# Altium PCB HAT_controller.PcbDoc (part 1 of 2)
Units mm, origin at the board's own origin, x right, y up, seen from the top; angles counter-clockwise.
Board outline 64 x 85 mm, 4 copper layers (Top Layer, Ground Plane, Power Plane, Bottom Layer), stack 0.844 mm thick; 109 components, 55 nets, 306 pads, 89 vias.
Unrouted connection lines stored in the file: 3.
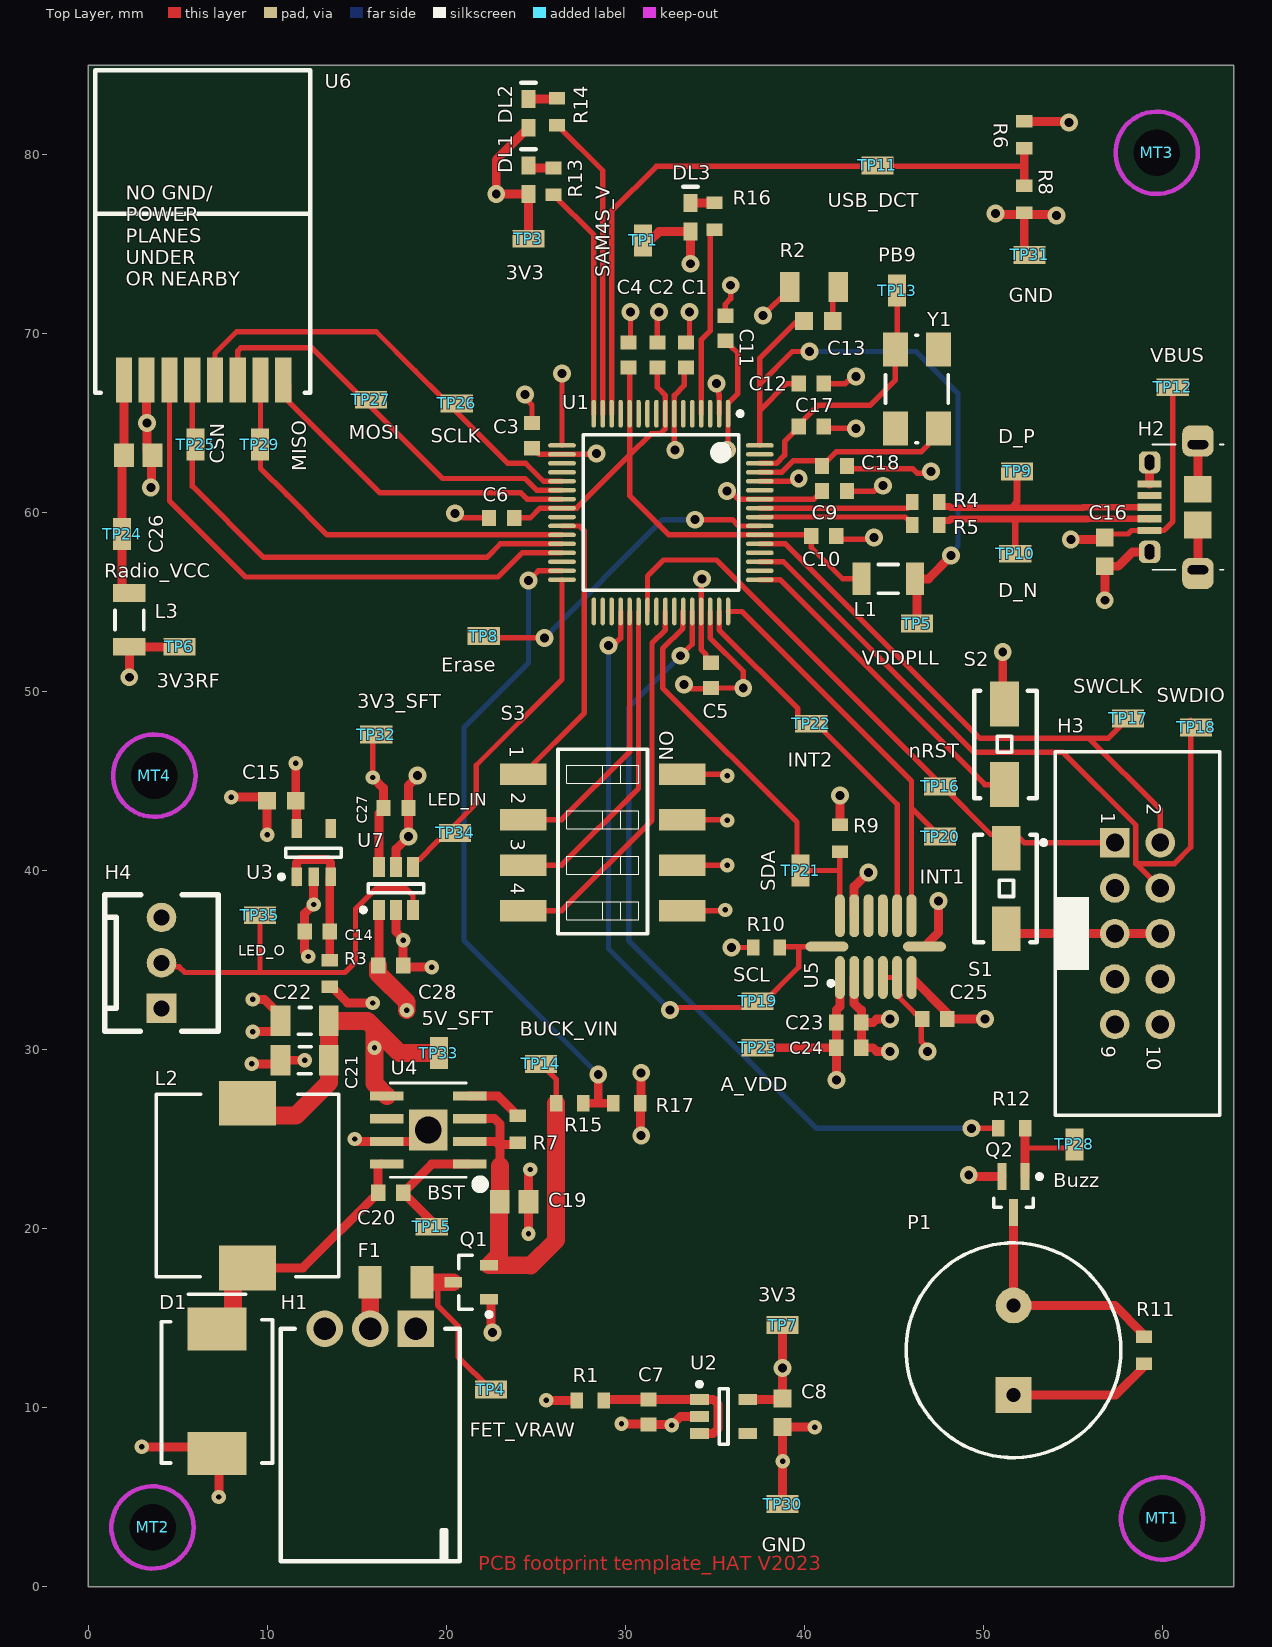
[diagram p0: Top Layer view]
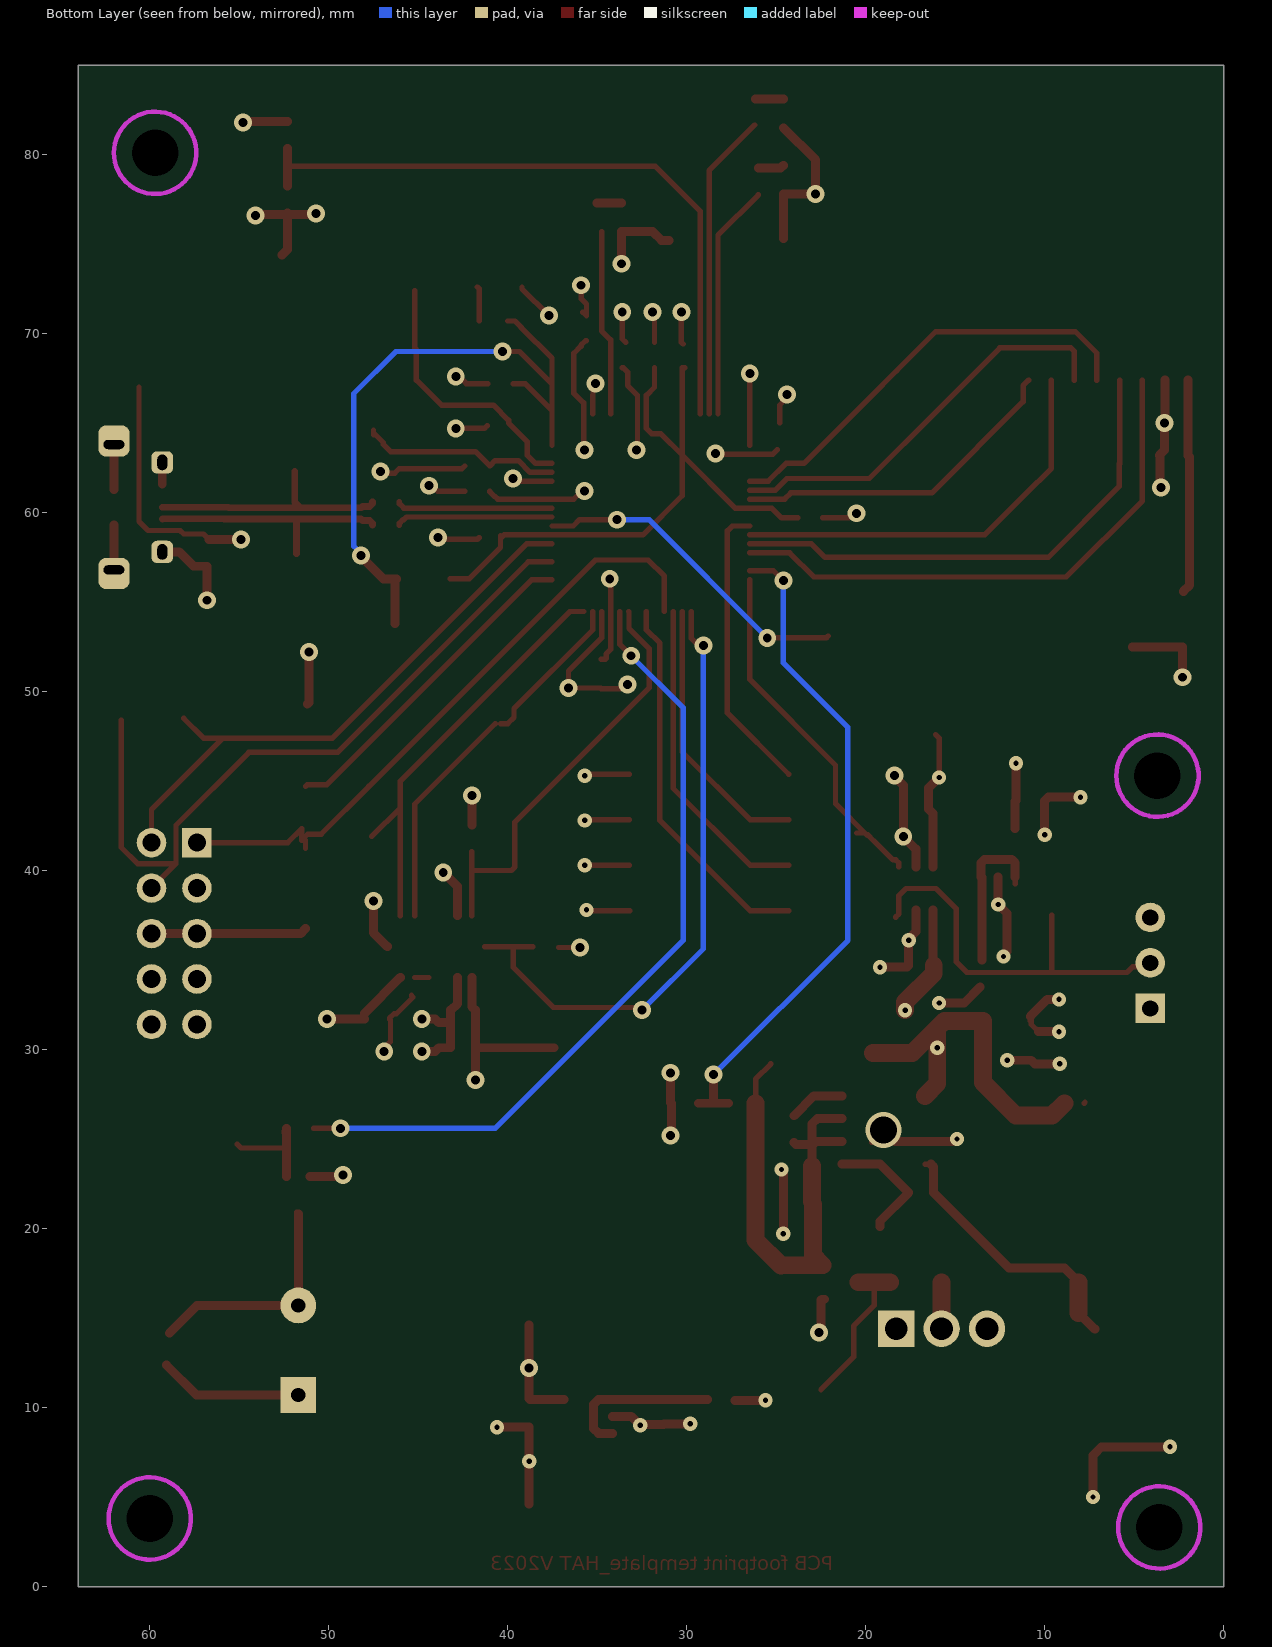
[diagram p1: Bottom Layer view, seen from below]
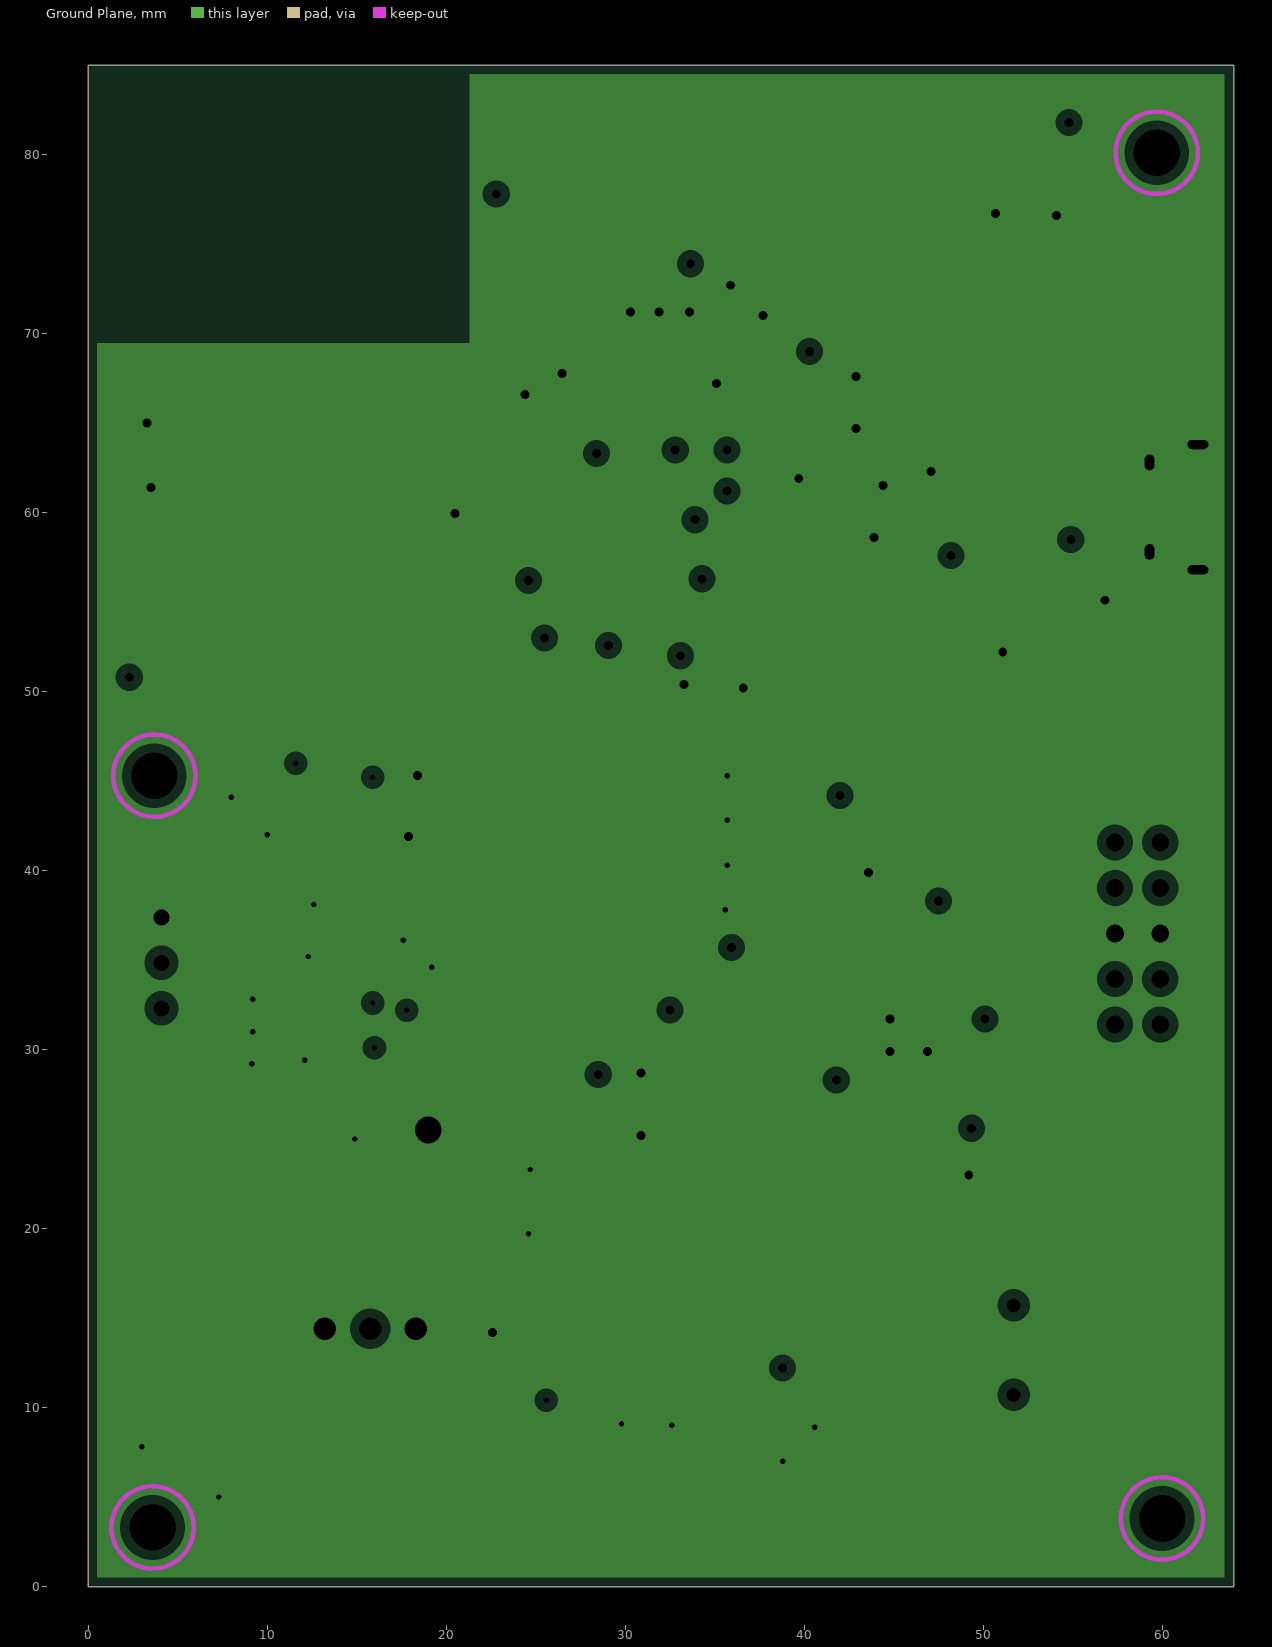
[diagram p2: Ground Plane, clearances drawn from the general rule]
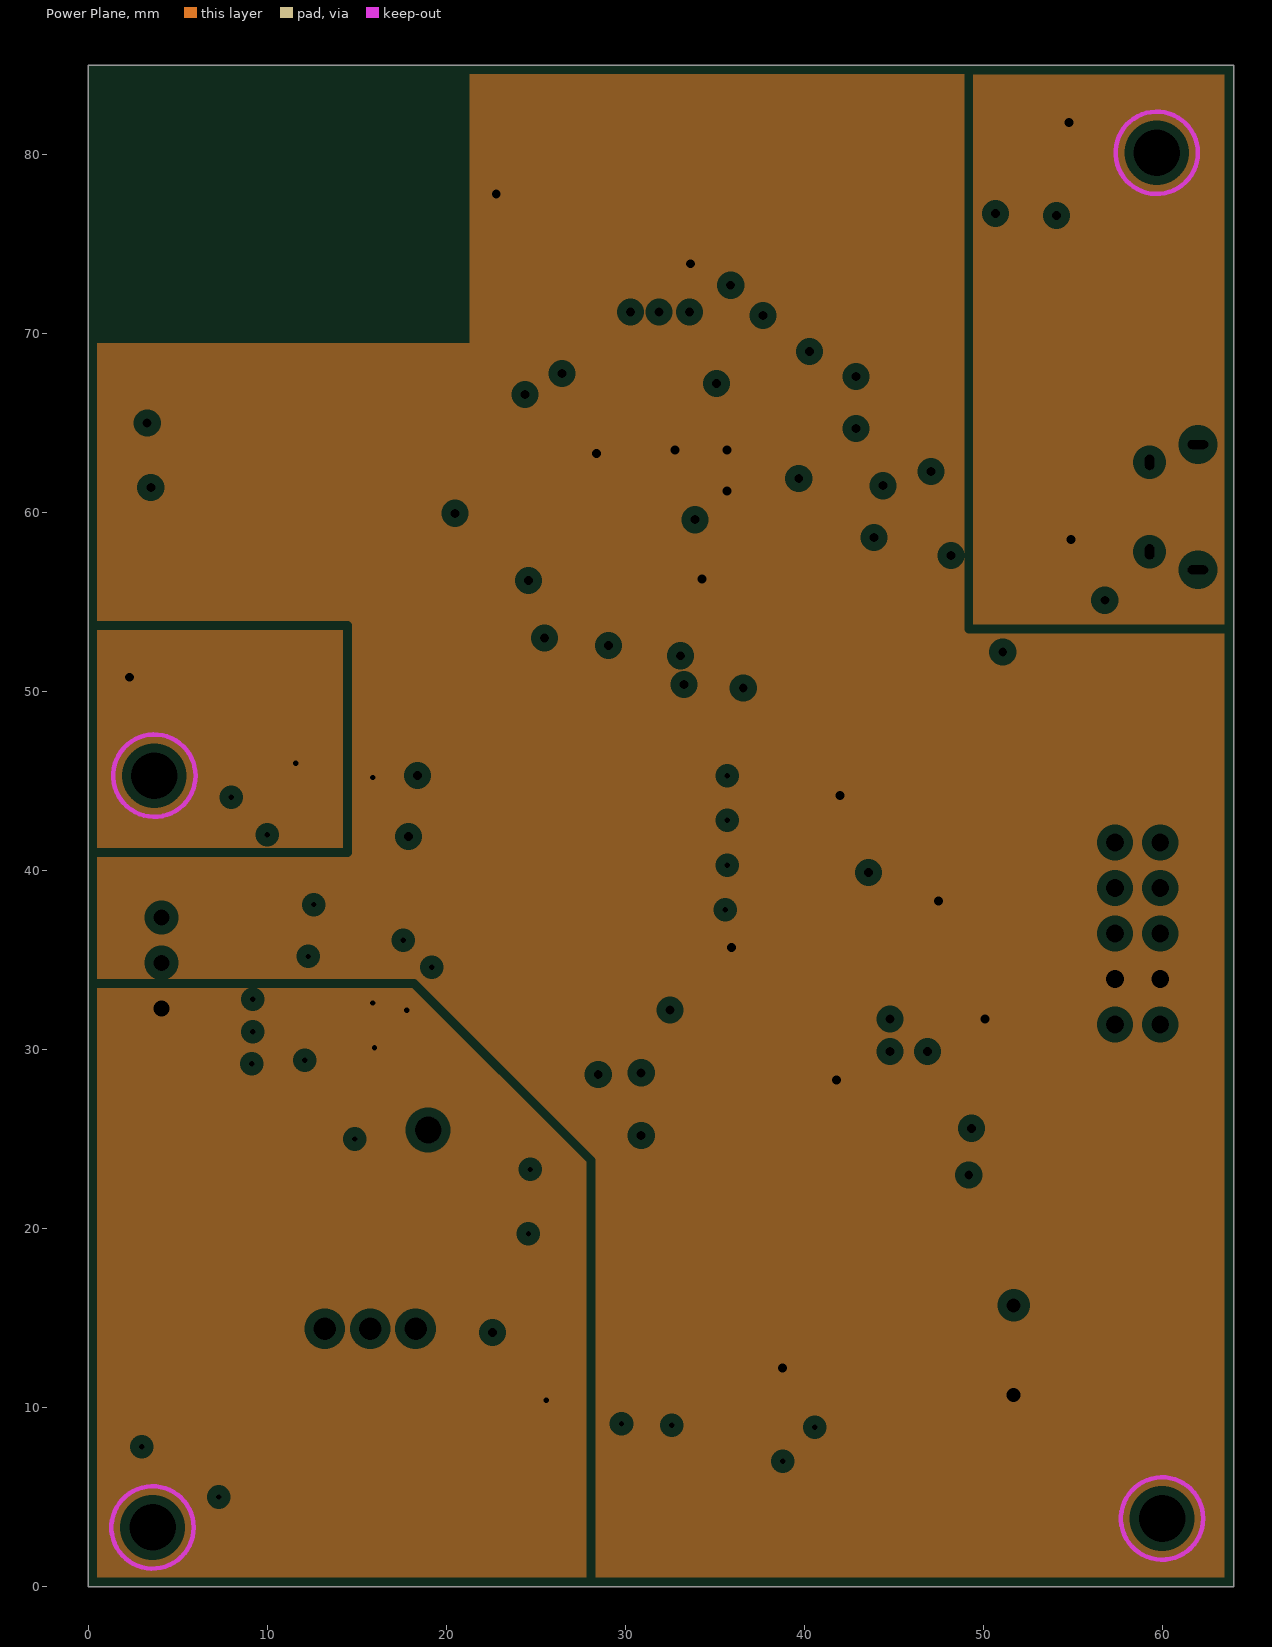
[diagram p3: Power Plane, clearances drawn from the general rule]

## Layer stack, top to bottom
Top Solder: solder mask 0.0102, Solder Resist, Dk 3.5
Top Layer: signal copper 0.0356
Dielectric 1: core 0.32, FR-4, Dk 4.8
Ground Plane: plane copper 0.036, net GND
Dielectric 3: prepreg 0.127, Dk 4.2
Power Plane: plane copper 0.036, net (Multiple Nets)
Dielectric 4: core 0.254, Dk 4.2
Bottom Layer: signal copper 0.0356
Bottom Solder: solder mask 0.0102, Solder Resist, Dk 3.5

## Board outline
0,85 64,85 64,0 0,0 0,85

## Design rules (kind name [scope] priority, off if disabled: settings)
BoardOutlineClearance [All] p1: gap=0.5 ignorepadtopadclearanceinfootprint=FALSE
Clearance GND_POLY [InNamedPolygon('GND')] p1: gap=0.254 ignorepadtopadclearanceinfootprint=FALSE
Clearance Min_Clearance_Circuit_Labs [All] p2: gap=0.2 ignorepadtopadclearanceinfootprint=FALSE
DiffPairsRouting [All] p1: maxlimit=0.254 minlimit=0.254 mostfreqgap=0.254 toplayer_minwidth=0.381 toplayer_maxwidth=0.381 toplayer_prefwidth=0.381 bottomlayer_minwidth=0.381 bottomlayer_maxwidth=0.381 bottomlayer_prefwidth=0.381 maxuncoupledlength=12.7
FanoutControl Fanout_BGA [IsBGA] p1 off: bgadir=Out bgaviamode=Centered fanoutstyle=Auto fanoutdirection=Alternating viagrid=0.025 // Fanout_BGA (Default Rule)
Height [All] p1: minheight=0 maxheight=50.8 prefheight=12.7
HoleSize [All] p1: absolutevalues=TRUE maxlimit=10 minlimit=0.3 maxpercent=80.000 minpercent=20.000
MinimumAnnularRing [All] p1: minimumring=0.1
MinimumSolderMaskSliver [All] p1: minsoldermaskwidth=0.102
NetAntennae [All] p1: netantennaetolerance=1
NetsToIgnore V_BATT [InNet('V_BATT')] p1:
NetsToIgnore 3v3rf [InNet('3V3_RF')] p2:
NetsToIgnore 3V3 [InNet('3V3')] p3:
PlaneClearance [All] p1: clearance=0.508
PlaneConnect [All] p1: planeconnectstyle=Relief reliefexpansion=0.508 reliefentries=4 reliefconductorwidth=0.254 reliefairgap=0.254
PolygonConnect [All] p1: connectstyle=Relief reliefconductorwidth=0.305 reliefentries=4 polygonreliefangle="90 Angle" airgapwidth=0.254
RoutingVias [All] p1: holewidth=0.5 width=1 viastyle="Through Hole" minholewidth=0.3 minwidth=0.8 maxholewidth=1 maxwidth=2
SMDNeckDown [All] p1 off: percent=50.000
SMDToCorner [All] p1: distance=98425
SMDToPlane [All] p1: distance=1968504
SilkToSolderMaskClearance SilkscreenOverComponentPads [IsPad] p1: minsilkscreentomaskgap=0.2 clearancetoexposedcopper=TRUE
SolderMaskExpansion [All] p1: expansion=0.102 istentingtop=FALSE
ViasUnderSMD [All] p1: allowed=FALSE
Width [All] p1: maxlimit=2 minlimit=0.2 preferedwidth=0.3
21 further rules are at their usual default settings.

## Classes and differential pairs
differential pair D: +D_P -D_N

## Components (designator, comment, footprint, x,y, rotation, side; value= is the part's Value field where it differs from the comment)
C1 "100nF" CAPC1608L 33.4,68.8 r270 top
C2 "100nF" CAPC1608L 31.8,68.8 r270 top
C3 "100nF" CAPC1608L 24.8,64.3 r270 top
C4 "100nF" CAPC1608L 30.2,68.8 r270 top
C5 "100nF" CAPC1608L 34.8,50.9 r90 top
C6 "100nF" CAPC1608L 23.1,59.7 r0 top
C7 "1uF" CAPC1608L 31.299,9.75 r270 top
C8 "4.7uF" CAPC1608N 38.8,9.7 r270 top
C9 "100nF" CAPC1608L 41.7,61.2 r180 top
C10 "100nF" CAPC1608L 41.1,58.7 r180 top
C11 "100nF" CAPC1608L 35.6,70.3 r270 top
C12 "100nF" CAPC1608L 40.4,67.2 r0 top
C13 "4.7uF" CAPC1608N 40.8,70.7 r0 top
C14 "1uF" CAPC1608L 12.8,36.6 r180 top
C15 "4.7uF" CAPC1608N 10.8,43.9 r180 top
C16 "4.7uF" CAPC1608N 56.8,57.8 r270 top
C17 "27pF" CAPC1608L 40.4,64.8 r180 top
C18 "27pF" CAPC1608L 41.7,62.6 r180 top
C19 "10uF" CAPC2012L 23.8,21.5 r0 top
C20 "100nF" CAPC1608L 16.9,22 r0 top
C21 "22uF" CAPC3216L 12.1,29.4 r0 top
C22 "22uF" CAPC3216L 12.1,31.6 r0 top
C23 "10uF" CAPC1608L 42.5,31.5 r180 top
C24 "100nF" CAPC1608L 42.5,30.1 r180 top
C25 "1uF" CAPC1608L 47.3,31.7 r180 top
C26 "10uF" CAPC2012L 2.8,63.2 r0 top
C27 "100nF" CAPC1608L 17.2,43.5 r180 top
C28 "100nF" CAPC1608L 16.9,34.7 r180 top
D1 "MBRS330T3G 30V 4A" SMC 7.2,10.9 r90 top
DL1 "Red" WL-SMCW0603 24.6,79.4 r270 top
DL2 "Green" WL-SMCW0603 24.6,83.1 r270 top
DL3 "Red" WL-SMCW0603 33.65,77.3 r270 top
F1 "5A" RESC3216N 17.2,17 r0 top
H1 "Battery_HEADER_3pin" BATT_HEADER_3POS 15.76,14.4 r180 top
H2 "JS_USB_MICRO_B" FCI_USB_10118194-0001LF 63.45,60.3 r90 top
H3 "Header 5X2 Vert" IDC2.54-V10D 58.63,36.48 r270 top
H4 "3 Pin Molex KK Hdr" MOLEX_KK_3_HDR 4.1,32.3 r90 top
L1 "1A max, Idc 0.3R," INDC3216L 44.7,56.3 r180 top
L2 "IND 5.2UH 6A" INDUCTOR5u2 8.9,22.4 r90 top
L3 "1A max, Idc 0.3R," INDC3216L 2.3,54 r270 top
MT1 "M2.6 NPTH" MNT-HOLE_2.6mm_NPTH 60,3.8 r0 top
MT2 "M2.6 NPTH" MNT-HOLE_2.6mm_NPTH 3.6,3.3 r0 top
MT3 "M2.6 NPTH" MNT-HOLE_2.6mm_NPTH 59.7,80.1 r0 top
MT4 "M2.6 NPTH" MNT-HOLE_2.6mm_NPTH 3.7,45.3 r0 top
P1 "Piezo Buzzer" BUZZER 51.7,10.7 r90 top
Q1 "SSM3J328R,LF" SOT23_L 21.4,17 r180 top
Q2 "BC817W" SOT323_M 51.7,21.9 r270 top
R1 "0R" RESC1608L 28.05,10.4 r0 top
R2 "1R" RESC3216L 40.55,72.6 r180 top
R3 "0R" RESC1608L 13.5,34.25 r90 top
R4 "27R" RESC1608L 46.8,60.6 r180 top
R5 "27R" RESC1608L 46.8,59.3 r180 top
R6 "1K" RESC1608L 52.3,81.1 r270 top
R7 "100K" RESC1608L 24,25.55 r90 top
R8 "2K" RESC1608L 52.3,77.5 r270 top
R9 "10K" RESC1608L 42,41.8 r90 top
R10 "10K" RESC1608L 37.9,35.7 r180 top
R11 "1K" RESC1608L 59,13.2 r90 top
R12 "470R" RESC1608L 51.6,25.6 r0 top
R13 "3K" RESC1608L 26,78.5 r270 top
R14 "2K" RESC1608L 26.2,82.4 r270 top
R15 "220K" RESC1608L 26.9,27 r180 top
R16 "3K" RESC1608L 35,76.55 r270 top
R17 "#NAME?" RESC1608L 30.1,27 r0 top value=180K
S1 "EVQPNF05M" EVQPNF05M 51.3,39 r90 top
S2 "EVQPNF05M" EVQPNF05M 51.2,47.05 r270 top
S3 "WS_SW DIP-4" "DIP_SW_4WAY_SMD -" 24.3,45.38 r270 top
TP1 "SAM4S_V" TP_0603 31,75.2 r90 top
TP3 "3V3" TP_0603 24.6,75.3 r0 top
TP4 "FET_VRAW" TP_0603 22.5,11 r0 top
TP5 "VDDPLL" TP_0603 46.3,53.8 r180 top
TP6 "3V3RF" TP_0603 5.1,52.5 r0 top
TP7 "3V3" TP_0603 38.8,14.6 r0 top
TP8 "Erase" TP_0603 22.1,53.1 r0 top
TP9 "D_P" TP_0603 51.9,62.3 r0 top
TP10 "D_N" TP_0603 51.8,57.7 r180 top
TP11 "USB_DCT" TP_0603 44.1,79.4 r180 top
TP12 "VBUS" TP_0603 60.6,67 r0 top
TP13 "PB9" TP_0603 45.2,72.4 r90 top
TP14 "BUCK_VIN" TP_0603 25.3,29.2 r0 top
TP15 "BST" TP_0603 19.2,20.1 r0 top
TP16 "nRST" TP_0603 47.6,44.7 r0 top
TP17 "SWCLK" TP_0603 58.1,48.5 r0 top
TP18 "SWDIO" TP_0603 61.9,48 r0 top
TP19 "SCL" TP_0603 37.4,32.7 r180 top
TP20 "INT1" TP_0603 47.6,41.9 r0 top
TP21 "SDA" TP_0603 39.8,40 r90 top
TP22 "INT2" TP_0603 40.4,48.2 r180 top
TP23 "A_VDD" TP_0603 37.4,30.1 r0 top
TP24 "Radio_VCC" TP_0603 1.9,58.8 r90 top
TP25 "CSN" TP_0603 6,63.8 r270 top
TP26 "SCLK" TP_0603 20.6,66.1 r0 top
TP27 "MOSI" TP_0603 15.8,66.3 r0 top
TP28 "Buzz" TP_0603 55.1,24.7 r90 top
TP29 "MISO" TP_0603 9.6,63.8 r90 top
TP30 "GND" TP_0603 38.8,4.6 r0 top
TP31 "GND" TP_0603 52.6,74.4 r0 top
TP32 "3V3_SFT" TP_0603 16.1,47.6 r0 top
TP33 "5V_SFT" TP_0603 19.6,29.8 r90 top
TP34 "LED_IN" TP_0603 20.5,42.1 r180 top
TP35 "LED_O" TP_0603 9.6,37.5 r180 top
U1 "ATSAM4S8BA-ANR" LQFP64_L 32,60 r270 top locked
U2 "CAT6219-330TDGT3" SOT95P280X145-5N 35.5,9.5 r0 top
U3 "CAT6219-330TDGT3" SOT95P280X145-5N 12.6,41 r90 top
U4 "ADP2302ARDZ-5.0 BUCK" RD_8_1 19,25.5 r180 top locked value=Value
U5 "ADXL345BCCZ" ADI-CC-14-1_V 44,35.75 r90 top locked
U6 "nRF24 SMD" NRF24 0.4,66.7 r0 top
U7 "SN74LVC1T45" SOT23-6_N 17.2,39 r90 top
Y1 "12MHz" 6.0X3.5-4 46.3,66.9 r270 top

## Footprints (in the part's own frame and the unit in brackets; to place one, negate y for a bottom-side part, rotate by r counter-clockwise, add the part's x,y. Pads: shape width x height; smd on the part's side, far side on the other; paste and mask are expansions set on the pad)
6.0X3.5-4 [mm] "4 SMD 6.0X3.5 mm No Lead Crystal"
  rect 1.9x1.4 smd: 1(-2.2,-1.2) 2(2.2,-1.2) 3(2.2,1.2) 4(-2.2,1.2)
  silkscreen extent -3,-1.75 3,1.75, body extent -3,-1.75 3,1.75, height 1.2
ADI-CC-14-1_V [mm]
  oval 2.4x0.55 smd: 1(-1.725,2) 2(-1.725,1.2) 3(-1.725,0.4) 4(-1.725,-0.4) 5(-1.725,-1.2) 6(-1.725,-2) 8(1.725,-2) 9(1.725,-1.2) 10(1.725,-0.4) 11(1.725,0.4) 12(1.725,1.2) 13(1.725,2)
  oval 0.55x2.4 smd: 7(0,-2.725) 14(0,2.725)
  silkscreen extent -2.18,2.37 -1.93,2.62, body extent -1.5,-2.5 1.5,2.5, height 1
BATT_HEADER_3POS [mil]
  rect 80x80 hole 50: 1(-100,0)
  round 80 hole 50: 2(0,0) 3(100,0)
  silkscreen extent -197,0 197,512, body extent -197,-31 200,504, height 294
BUZZER [mm]
  rect 2x2 hole 0.8: 1(0,0)
  round 2 hole 0.8: 2(5,0)
  silkscreen extent -3.5,-6 8.5,6, body extent -3.58,-6.08 8.58,6.08, height 6.5
CAPC1608L [mm] "Chip Capacitor, Body 1.6x0.8mm, IPC High Density"
  rect 0.8x0.9 smd: 1(-0.7,0) 2(0.7,0)
  body extent -0.87,-0.48 0.87,0.48, height 0.85
CAPC1608N [mm] "Chip Capacitor, Body 1.6x0.8mm, IPC Medium Density"
  rect 1x1 smd: 1(-0.8,0) 2(0.8,0)
  body extent -0.87,-0.48 0.87,0.48, height 0.85
CAPC2012L [mm] "Chip Capacitor, Body 2.0x1.3mm, IPC High Density"
  rect 1.1x1.3 smd: 1(-0.8,0) 2(0.8,0)
  body extent -1.1,-0.72 1.1,0.72, height 1.1
CAPC3216L [mm] "Chip Capacitor, Body 3.2x1.6mm, IPC High Density"
  rect 1.1x1.7 smd: 1(-1.35,0) 2(1.35,0)
  silkscreen extent -0.35,-0.75 0.35,0.75, body extent -1.7,-0.9 1.7,0.9, height 1.35
"DIP_SW_4WAY_SMD -" [mm] "DIP Switch; 8 Leads"
  rect 1.2x2.6 smd: 1(0,0) 2(2.54,0) 3(5.08,0) 4(7.62,0) 5(7.62,8.89) 6(5.08,8.9) 7(2.54,8.9) 8(0,8.9)
  silkscreen extent -1.4,1.95 8.9,6.95
EVQPNF05M [mm] "Panansonic light touch SMD push button switch"
  rect 2.5x1.6 smd: 1(-2.25,0) 2(2.25,0)
  silkscreen extent -3,-1.7 3,1.8, body extent -3,-1.7 3,1.8, height 5
FCI_USB_10118194-0001LF [mm] "Micro USB B Type Receptacle"
  rect 0.4x1.35 smd mask+0.07: 1(-1.3,4.15) 2(-0.65,4.15) 3(0,4.15) 4(0.65,4.15) 5(1.3,4.15)
  rrect50% 1.75x1.75 hole 0.5 slot 1.15 at 90 deg copper offset -0.2,0 paste-2539.97 mask+0.1: 6(-3.5,1.45)
  rrect50% 1.25x1.2 hole 0.55 slot 0.85 at 0 deg: 6(-2.5,4.15) 6(2.5,4.15)
  rect 1.5x1.55 smd: 6(-1,1.45) 6(1,1.45)
  rrect50% 1.75x1.75 hole 0.5 slot 1.15 at 90 deg copper offset 0.2,0 paste-2539.97 mask+0.1: 6(3.5,1.45)
  silkscreen extent -3.5,0 3.5,4
IDC2.54-V10D [mm] "Connector; IDC, Low Profile Male Header, Thru-Hole; 10 Position; Vertical; Pitch 2.54 mm; Body 20.32 x 9.2 x 9.45 mm (LxWxH)"
  rect 1.65x1.65 hole 1: 1(-5.08,-1.27)
  round 1.65 hole 1: 2(-5.08,1.27) 3(-2.54,-1.27) 4(-2.54,1.27) 5(0,-1.27) 6(0,1.27) 7(2.54,-1.27) 8(2.54,1.27) 9(5.08,-1.27) 10(5.08,1.27)
  silkscreen extent -10.16,-5.37 10.16,4.6, body extent -10.16,-4.6 10.16,4.6, height 9.45
INDC3216L [mm] "Chip Inductor, Body 3.2x1.6mm, IPC High Density"
  rect 1x1.8 smd: 1(-1.5,0) 2(1.5,0)
  silkscreen extent -0.55,-0.8 0.55,0.8, body extent -1.75,-0.95 1.75,0.95, height 1.9
INDUCTOR5u2 [mm]
  rect 2.5x3.2 smd: 1(-4.6,0) 2(4.6,0)
  silkscreen extent -5.1,-5.1 5.1,5.1, body extent -5,-5 5,5, height 3.8
LQFP64_L [mm] "Thin QFP, 64-Leads, Body 10x10mm, Pitch 0.5mm, IPC High Density"
  oval 1.55x0.25 smd mask+0.07: 1(-5.525,3.75) 2(-5.525,3.25) 3(-5.525,2.75) 4(-5.525,2.25) 5(-5.525,1.75) 6(-5.525,1.25) 7(-5.525,0.75) 8(-5.525,0.25) 9(-5.525,-0.25) 10(-5.525,-0.75) 11(-5.525,-1.25) 12(-5.525,-1.75) 13(-5.525,-2.25) 14(-5.525,-2.75) 15(-5.525,-3.25) 16(-5.525,-3.75) 33(5.525,-3.75) 34(5.525,-3.25) 35(5.525,-2.75) 36(5.525,-2.25) 37(5.525,-1.75) 38(5.525,-1.25) 39(5.525,-0.75) 40(5.525,-0.25) 41(5.525,0.25) 42(5.525,0.75) 43(5.525,1.25) 44(5.525,1.75) 45(5.525,2.25) 46(5.525,2.75) 47(5.525,3.25) 48(5.525,3.75)
  oval 0.25x1.55 smd mask+0.07: 17(-3.75,-5.525) 18(-3.25,-5.525) 19(-2.75,-5.525) 20(-2.25,-5.525) 21(-1.75,-5.525) 22(-1.25,-5.525) 23(-0.75,-5.525) 24(-0.25,-5.525) 25(0.25,-5.525) 26(0.75,-5.525) 27(1.25,-5.525) 28(1.75,-5.525) 29(2.25,-5.525) 30(2.75,-5.525) 31(3.25,-5.525) 32(3.75,-5.525) 49(3.75,5.525) 50(3.25,5.525) 51(2.75,5.525) 52(2.25,5.525) 53(1.75,5.525) 54(1.25,5.525) 55(0.75,5.525) 56(0.25,5.525) 57(-0.25,5.525) 58(-0.75,5.525) 59(-1.25,5.525) 60(-1.75,5.525) 61(-2.25,5.525) 62(-2.75,5.525) 63(-3.25,5.525) 64(-3.75,5.525)
  silkscreen extent -5.65,-4.35 4.35,4.55, body extent -5,-5 5,5, height 1.6
MNT-HOLE_2.6mm_NPTH [mm] "Mounting Hole 2.6mm non plated"
  round 0 hole 2.6 unplated: 1(0,0)
  Keep-Out Layer circle w0.254: c0,0 r2.3
MOLEX_KK_3_HDR [mil] "MOLEX_KK_3_HDR"
  rect 65x65 hole 35.43: 1(0,0)
  round 65 hole 35.43: 2(100,0) 3(200,0)
  silkscreen extent -50,-125 250,125, body extent -50,-114 250,114, height 461
NRF24 [mm]
  rect 0.9x2.5 smd: 1(1.6,0.7) 2(2.871,0.7) 3(4.143,0.7) 4(5.414,0.7) 5(6.686,0.7) 6(7.957,0.7) 7(9.229,0.7) 8(10.5,0.7)
  silkscreen extent 0,0 12,18, body extent 0,0 12,18, height 2.27
RD_8_1 [mil]
  rect 74x20 smd paste+0 mask+0: 1(-91,75) 2(-91,25) 3(-91,-25) 4(-91,-75) 5(91,-75) 6(91,-25) 7(91,25) 8(91,75)
  rect 84.65x90 smd paste-44.5 mask+0: EPAD(0,0)
  silkscreen extent -118,-104 84,123, body extent 0,0 10,10, height 10
RESC1608L [mm] "Chip Resistor, Body 1.6x0.8mm, IPC High Density"
  rect 0.7x0.9 smd: 1(-0.75,0) 2(0.75,0)
  body extent -0.85,-0.48 0.85,0.48, height 0.9
RESC3216L [mm] "Chip Resistor, Body 3.1x1.6mm, IPC High Density"
  rect 1.1x1.7 smd: 1(-1.35,0) 2(1.35,0)
  body extent -1.68,-0.87 1.68,0.87, height 2.54
RESC3216N [mm] "Chip Resistor, Body 3.2x1.6mm, IPC Medium Density"
  rect 1.3x1.8 smd: 1(-1.45,0) 2(1.45,0)
  body extent -1.68,-0.87 1.68,0.87, height 0.71
SMC [mm] "DO-214-AB/SMC; 2 C-Bend Leads; Body 7.9 x 5.9 mm, inc. leads (LxW)"
  rect 2.4x3.3 smd: 1(-3.475,0) 2(3.475,0)
  silkscreen extent -4,-3.1 5.43,3.1, body extent -4.22,-2.95 3.72,2.95, height 2.27
SOT23-6_N [mm]
  rect 1.1x0.65 smd: 1(-1.2,0.95) 2(-1.2,0) 3(-1.2,-0.95) 4(1.2,-0.95) 5(1.2,0) 6(1.2,0.95)
  silkscreen extent -1.32,-1.55 0.25,1.95, body extent -0.9,-1.55 0.9,1.55, height 1.45
SOT23_L [mm] "SOT23, 3-Leads, Body 2.9x1.3mm, Pitch 0.95mm, Lead Span 2.3mm, IPC High Density"
  rect 1x0.6 smd: 1(-1,0.95) 2(-1,-0.95) 3(1,0)
  silkscreen extent -1.13,-1.5 0.7,1.92, body extent -0.7,-1.5 0.7,1.5, height 1.1
SOT95P280X145-5N [mm] "SOT23, 5-Leads, Body 2.90x2.80mm, Pitch 0.95mm, IPC Medium Density"
  rect 1.05x0.6 smd: 1(-1.35,0.95) 2(-1.35,0) 3(-1.35,-0.95) 4(1.35,-0.95) 5(1.35,0.95)
  silkscreen extent -1.47,-1.55 0.25,1.92, body extent -0.87,-1.52 0.87,1.53, height 1.45
SOT323_M [mm] "SOT323, 3-Leads, Body 2.0x1.3mm, Pitch 0.65mm, Lead Span 2.1mm, IPC Low Density"
  rect 1.5x0.5 smd: 1(-1,0.65) 2(-1,-0.65) 3(1,0)
  silkscreen extent -1.12,-1.1 0.7,1.58, body extent -0.7,-1.1 0.7,1.1, height 1.1
TP_0603 [mm] "TestPoint 0603"
  rect 1.8x1 smd: 1(0,0)
  body extent -1,-0.6 1,0.6, height 0.9
WL-SMCW0603 [mm] "2.4 x 0.8 x 0.7mm LED"
  rect 1x0.8 smd: 1(0,0) 2(1.6,0)
  silkscreen extent -0.9,-0.4 -0.9,0.4

## Part data
C1 C2 C3 C4 C5 C6 C9 C10 C11 C12 C20 C24 C27 C28: library part CC_100nF_0603, "CAP CER 100nF X7R +-10% 50V 0603", Code_IPC="1608 [0603]", PackageReference=0603, Storage Location="PCB Assembly WS", Supplier="ECE Dept"
C7 C14 C25: library part CC_1uF_0603, "CAP CER 1uF Y5V -20% +80% 16V 0603", Max Voltage=16V, Code_IPC="1608 [0603]", PackageReference=0603, Storage Location="PCB Assembly WS", Supplier="ECE Dept"
C8 C13 C15 C16: library part CC_4.7uF_0603, "CAP CER 4.7uF X5R +-20%  10V 0603", Max Voltage=10V, Code_IPC=2012[0805], Note="Footprint corresponds to dimensions for bulk cassette packaging. This case size has tightened tolerances.", PackageReference=0805, Storage Location="PCB Assembly WS", Supplier="ECE Dept"
C17 C18: library part CC_27pF_0603, "CAP CER 27pF NPO/COG +-5% 50V 0603", Code_IPC="1608 [0603]", PackageReference=0603, Storage Location="PCB Assembly WS", Supplier="ECE Dept"
C19: library part CC_10uF_0805_16V, "CAP CER 10uF X5R 16V 0805", Manufacturer="Samsung Electro-Mechanics", Manufacturer Part Number=CL21A106KOQNNWE, Max Voltage=16V, Operating Temperature="-55°C ~ 85°C", Package / Case="0805 (2012 Metric)", Ratings=-, Supplier Part Number 1=1276-2894-1-ND, Temperature Coefficient=X5R, Tolerance=±10%, Applications="General Purpose", Category=Capacitors, Code_IPC=2012[0805], ComponentLink1Description=http://www.samsungsem.com/kr/support/product-search/mlcc/CL21A106KOQNNWE.jsp, ComponentLink1URL=http://www.samsungsem.com/kr/support/product-search/mlcc/CL21A106KOQNNWE.jsp, Features=-, Height - Seated (Max)=-, Lead Spacing=-, Lead Style=-, Mounting Type="Surface Mount, MLCC", Note="Footprint corresponds to dimensions for bulk cassette packaging. This case size has tightened tolerances.", Notification="Current market demand for these product types have resulted in fluctuating and extending lead times. Lead times may differ.", PackageReference=0805, Packaging="Cut Tape (CT)", Part Status=Active, Pricing 1="1=0.35, 10=0.25, 100=0.1178, 500=0.08254, 1000=0.06831 (NZD)", RoHS="RoHS Compliant", Size / Dimension="0.079\" L x 0.049\" W (2.00mm x 1.25mm)", Stock 1=20000, Supplier 1=Digi-Key, Thickness (Max)="0.055\" (1.40mm)", Voltage - Rated=16V
C21 C22: library part CC_22uF_1206, "CAP CER 22uF Y5V -20% +80% 10V 1206", Dielectric=Y5V, Max Voltage=10V, Storage Location="PCB Assembly WS", Supplier="ECE Dept"
C23: library part CC_10uF_0603, "CAP CER 10UF X5R +-20% 6V3 0603", Voltage - Rated=6.3V, Storage Location="PCB Assembly WS", Supplier="ECE Dept"
C26: library part CC_10uF_0805_16V, "CAP CER 10uF X5R 16V 0805", Manufacturer="Samsung Electro-Mechanics", Manufacturer Part Number=CL21A106KOQNNWE, Operating Temperature="-55°C ~ 85°C", Package / Case="0805 (2012 Metric)", Ratings=-, Supplier Part Number 1=1276-2894-1-ND, Temperature Coefficient=X5R, Tolerance=±10%, Voltage - Rated=16V, Applications="General Purpose", Category=Capacitors, Code_IPC=2012[0805], ComponentLink1Description=http://www.samsungsem.com/kr/support/product-search/mlcc/CL21A106KOQNNWE.jsp, ComponentLink1URL=http://www.samsungsem.com/kr/support/product-search/mlcc/CL21A106KOQNNWE.jsp, Features=-, Height - Seated (Max)=-, Lead Spacing=-, Lead Style=-, Mounting Type="Surface Mount, MLCC", Note="Footprint corresponds to dimensions for bulk cassette packaging. This case size has tightened tolerances.", Notification="Current market demand for these product types have resulted in fluctuating and extending lead times. Lead times may differ.", PackageReference=0805, Packaging="Cut Tape (CT)", Part Status=Active, Pricing 1="1=0.35, 10=0.25, 100=0.1178, 500=0.08254, 1000=0.06831 (NZD)", RoHS="RoHS Compliant", Size / Dimension="0.079\" L x 0.049\" W (2.00mm x 1.25mm)", Stock 1=20000, Supplier 1=Digi-Key, Thickness (Max)="0.055\" (1.40mm)"
D1: library part MBRS330T3G, "SCHOTTKY  30V 4A", Base Part Number=MBRS330, Capacitance @ Vr, F=-, Current - Average Rectified (Io)=4A, Manufacturer="ON Semiconductor", Operating Temperature - Junction="-65°C ~ 150°C", Package / Case="DO-214AB, SMC", Supplier Device Package=SMC, Supplier Part Number 1=MBRS330T3GOSCT-ND, Category="Discrete Semiconductor Products", ComponentLink1Description=http://www.onsemi.com/pub/Collateral/MBRS340T3-D.PDF, ComponentLink1URL=http://www.onsemi.com/pub/Collateral/MBRS340T3-D.PDF, Diode Type=Schottky, Manufacturer Part Number=MBRS330T3G, Mounting Type="Surface Mount", Packaging="Cut Tape (CT)", Part Status=Active, Pricing 1="1=0.93, 10=0.79, 100=0.5902, 500=0.46368, 1000=0.35829 (NZD)", RoHS="RoHS Compliant", Speed="Fast Recovery =< 500ns, > 200mA (Io)", Stock 1=8919, Supplier 1=Digi-Key
DL1 DL3: library part DL_150060RS75000, "LED Red 250mcd 0603 SMD", Forward Current If=30, Forward Voltage=2, Manufacturer="WURTH ELEKTRONIK", Manufacturer Part Number=150060RS75000, Supplier Part Number 1=2322071, LED Colour=Red, LED Mounting=SMD, Lens Shape=Rectangular, Luminous Intensity=250, Storage Location="PCB Assembly WS", Supplier="ECE Dept", Supplier 1=Farnell, Viewing Angle=140°, Wavelength Typ=625
DL2: library part DL_150060GS75000, "LED Green 430mcd 0603 SMD", Forward Current If=30, Forward Voltage=3.2, Manufacturer="WURTH ELEKTRONIK", Manufacturer Part Number=150060GS75000, Supplier Part Number 1=2322070, LED Colour=Green, LED Mounting=SMD, Lens Shape=Rectangular, Luminous Intensity=430, Storage Location="PCB Assembly WS", Supplier="ECE Dept", Supplier 1=Farnell, Viewing Angle=140°, Wavelength Typ=520
F1: library part FS_Fuse_5.0A, "Fuse 5.0A Fast Acting 1206 SMD", Case Code (Imperial)=1206, Case Code (Metric)=3216, DC Cold Resistance=19mR, Manufacturer="Bel TRP", Manufacturer Part Number=C1F5, Max Operating Temperature=125°C, Min Operating Temperature=-55°C, Supplier Part Number 1=507-1886-1-ND, Voltage Rating=125V, Voltage Rating (DC)=63V, Approvals=CE,cURus, Case/Package=1206, ComponentLink1Description=http://www.farnell.com/datasheets/2571625.pdf, ComponentLink1URL=http://www.farnell.com/datasheets/2571625.pdf, ComponentLink2Description=http://belfuse.com/pdfs/C1F.pdf, ComponentLink2URL=http://belfuse.com/pdfs/C1F.pdf, ComponentLink3Description=http://www.mouser.com/ds/2/643/C1F-594910.pdf, ComponentLink3URL=http://www.mouser.com/ds/2/643/C1F-594910.pdf, ComponentLink4Description=https://belfuse.com/resources/StewartConnector/C1F.pdf, ComponentLink4URL=https://belfuse.com/resources/StewartConnector/C1F.pdf, Contact Plating=Nickel,Tin, Current Rating=5A, Fuse Type="Board Mount (Cartridge Style Excluded)", Length=0.126inch, Mount="Surface Mount", Number of Pins=2, Packaging="Tape and Reel", Pricing 1="1=0.32, 5=0.312, 10=0.298, 50=0.2662, 100=0.2479, 250=0.22032, 500=0.1836, 1000=0.17442 (USD)", Stock 1=725, Supplier 1=Digi-Key, Supplier 2=Element14, Supplier Part Number 2=2848595, Voltage Rating (AC)=125V, Width=0.062inch
H1: "3Pin Header 2.54mm spacing / Digikey #WM22663-ND", Supplier Part Number 1=WM22663-ND, Supplier 1=Digi-Key
H2: library part JS_USB_MICRO_B_SMT, "CONN USB MICRO B RECPT SMT R/A", Manufacturer=FCI, Manufacturer Part Number=10118194-0001LF, Supplier Part Number 1=609-4618-1-ND, Features="Shielded, Solder Retention", Gender=Receptacle, Mounting Type="Surface Mount, Right Angle, Horizontal", Number of Contacts=5, Specifications="USB 2.0", Supplier 1=Digi-Key
H3: library part JA_HDR_IDC_5X2_VERT, "IDC Header, 2,54mm, 10-Pin, Vert", Supplier Part Number 1=1096985, Storage Location="ECE Dept Store", Supplier="ECE Dept", Supplier 1=Farnell
H4: library part LED_Strip_Header, "CONN HEADER 3POS 2.54mm VERT_Thru Hole", Manufacturer=Molex, Manufacturer PN=22-23-2031, Supplier Part Number 1=9731156, Storage Location="ECE Dept Store", Supplier="ECE Dept", Supplier 1=Farnell
L1 L3: library part IN_Ferrite-Bead, "Ferrite Bead, Rdc 0.3R, Z100MHZ 600R, Imax 1A, SMD 1206", DC Current Rating=1, DC Resistance Max=0.08, Ferrite Case Style="1206 ^3216 Metric]", Frequency Range="50MHz to 1", Impedance Tolerance="± 25%", Manufacturer=FAIR-RITE, Manufacturer Part Number=2512066017Y1, Supplier Part Number 1=1612060, Ferrite Mounting=SMD, Impedance=600, Manufacturer PN=2512066017Y1, Storage Location="PCB Assembly WS", Supplier="ECE Dept", Supplier 1=Farnell
L2: library part CDRH104RNP-5R2NC, "FIXED IND 5.2UH 6A 22 MOHM SMD", Current - Saturation=5.6A, DC Resistance (DCR)="22 mOhm Max", Frequency - Self Resonant=-, Manufacturer="Sumida America Components Inc.", Operating Temperature="-40°C ~ 100°C", Package / Case=Nonstandard, Supplier Part Number 1=308-2280-1-ND, Tolerance=±30%, Category="Inductors, Coils, Chokes", ComponentLink1Description=http://products.sumida.com/products/pdf/CDRH104R.pdf, ComponentLink1URL=http://products.sumida.com/products/pdf/CDRH104R.pdf, Height - Seated (Max)="0.157\" (4.00mm)", Manufacturer Part Number=CDRH104RNP-5R2NC, Material - Core=Ferrite, Mounting Type="Surface Mount", Packaging="Cut Tape (CT)", Part Status=Active, Pricing 1="1=2.9, 10=2.678, 100=1.8743, 500=1.5173 (NZD)", Q @ Freq=-, Ratings=-, RoHS="RoHS Compliant", Shielding=Shielded, Size / Dimension="0.402\" L x 0.394\" W (10.20mm x 10.00mm)", Stock 1=3849, Supplier 1=Digi-Key, Supplier Device Package=-, Type=-
MT1 MT2 MT3 MT4: library part MC_M2.6_HOLE, "Fixing M2.6 Mount Hole NPTH", Manufacturer=Hi-Q, Manufacturer PN="2BV series M2.5 Clearance", Price=0, Supplier="ECE Dept"
P1: "TDK - PS1240P02BT - BUZZER, PIEZO, 70DB, 12.2MM", Frequency=4kHz, Manufacturer 1=TDK, Manufacturer Part Number 1=PS1240P02BT, Max Operating Temperature=70°C, Min Operating Temperature=-10°C, Operating Supply Voltage=3V, Package Quantity=1, Supplier Part Number 1=445-2525-1-ND, ComponentLink1Description=https://datasheet.ciiva.com/0/ef532-ps-112.pdf?src-supplier=Digi-Key, ComponentLink1URL=https://datasheet.ciiva.com/0/ef532-ps-112.pdf?src-supplier=Digi-Key, ComponentLink2Description=https://datasheet.ciiva.com/0/ef532-ps-111.pdf?src-supplier=Digi-Key, ComponentLink2URL=https://datasheet.ciiva.com/0/ef532-ps-111.pdf?src-supplier=Digi-Key, ComponentLink3Description=https://datasheet.ciiva.com/3306/ef532-ps-3306958.pdf?src-supplier=Avnet, ComponentLink3URL=https://datasheet.ciiva.com/3306/ef532-ps-3306958.pdf?src-supplier=Avnet, ComponentLink4Description=https://datasheet.ciiva.com/16225/ef532-ps-16225062.pdf?src-supplier=Onlinecomponents.com, ComponentLink4URL=https://datasheet.ciiva.com/16225/ef532-ps-16225062.pdf?src-supplier=Onlinecomponents.com, Diameter=12.2mm, Height=6.5mm, Lead Free="Lead Free", Mount="Through Hole", Number of Pins=2, Number of Terminals/Pins=2, Packaging="Tape and Reel", Pricing 1="1=0.61000, 10=0.52500, 25=0.49120, 50=0.46580, 100=0.44110 (USD)", RoHS=Yes, RoHS Compliant=Yes, Series=PS, Stock 1=24025, Supplier 1=Digi-Key, Termination="PC Pins", Voltage Rating (DC)=3V, Washable=No
Q1: library part TM_SSM3J328R, "MOSFET P-CH 20V 6A SOT23-3", Case/Package=SOT-23-3, Continuous Drain Current (ID)=6A, Drain to Source Breakdown Voltage=-20V, Drain to Source Resistance=47.4mR, Drain to Source Voltage (Vdss)=20V, Gate to Source Voltage (Vgs)=8V, Input Capacitance=840pF, Input Capacitance (Ciss) @ Vds="840pF @ 10V", Manufacturer=Toshiba, Max Operating Temperature=150°C, Max Power Dissipation=1W, Min Operating Temperature=-55°C, Package / Case="SOT-23-3 Flat Leads", Package Quantity=3000, Power Dissipation=2W, Supplier Device Package=SOT-23F, Supplier Part Number=SSM3J328RLFDKR-ND, ComponentLink1Description=https://datasheet.ciiva.com/11158/ssm3j328r-datasheet-en-20140301-11158652.pdf, ComponentLink1URL=https://datasheet.ciiva.com/11158/ssm3j328r-datasheet-en-20140301-11158652.pdf, Current - Continuous Drain (Id) @ 25° C=6A, Element Configuration=Single, FET Feature="Logic Level Gate, 1.5V Drive", FET Type="MOSFET P-Channel, Metal Oxide", Gate Charge (Qg) @ Vgs="12.8nC @ 4.5V", Manufacturer Part Number=SSM3J328R,LF, Mount="Surface Mount", Number of Channels=1, Number of Elements=1, Number of Pins=3, Packaging="Tape and Reel", Power - Max=1W, Pricing="1=0.79, 10=0.658, 25=0.5772, 100=0.4939, 250=0.42836, 500=0.36284, 1000=0.27972 (NZD)", Radiation Hardening=No, Rds On Max=29.8mR, Storage Location="PCB Assembly WS", Supplier=Digi-Key, Supplier 1=Digi-Key, Supplier Part Number 1=SSM3J328RLFDKR-ND, Turn-Off Delay Time=107ns, Turn-On Delay Time=32ns, Vgs(th) (Max) @ Id="1V @ 1mA"
Q2: library part TB_BC817W, "NPN GP Bipolar Transistor 45V 500mA SOT323", Manufacturer=NXP, Supplier Part Number 1=2114873, Manufacturer PN=BC817W, Storage Location="PCB Assembly WS", Supplier="ECE Dept", Supplier 1=Farnell, Supplier 2=Digi-Key, Supplier Part Number 2=1727-4843-1-ND
R1 R3: library part RS_0R0, "RES 0.0 OHM 1/10W 5% 0603 SMD", Storage Location="PCB Assembly WS", Supplier="ECE Dept"
R2: library part RT_1R, "RES 1R OHM 1/4W 5% 1206 SMD", Storage Location="PCB Assembly WS", Supplier="ECE Dept"
R4 R5: library part RS_27R, "RES 27 OHM 1/10W 5% 0603 SMD", Storage Location="PCB Assembly WS", Supplier="ECE Dept"
R6 R11: library part RS_1K, "RES 1.0K OHM 1/10W 5% 0603 SMD", Storage Location="PCB Assembly WS", Supplier="ECE Dept"
R7: library part RS_100K, "RES 100K OHM 1/10W 5% 0603 SMD", Storage Location="PCB Assembly WS", Supplier="ECE Dept"
R8 R14: library part RS_2K, "RES 2K OHM 1/10W 5% 0603 SMD", Storage Location="PCB Assembly WS", Supplier="ECE Dept"
R9 R10: library part RS_10K, "RES 10.0K OHM 1/10W 5% 0603 SMD", Storage Location="PCB Assembly WS", Supplier="ECE Dept"
R12: library part RS_470R, "RES 470 OHM 1/10W 5% 0603 SMD", Storage Location="PCB Assembly WS", Supplier="ECE Dept"
R13 R16: library part RS_3K, "RES 3K OHM 1/10W 5% 0603 SMD", Storage Location="PCB Assembly WS", Supplier="ECE Dept"
R15: library part RS_220K, "RES 3.3K OHM 1/10W 5% 0603 SMD", Storage Location="PCB Assembly WS", Supplier="ECE Dept"
R17: library part RS_180K, "RES 180K OHM 1/10W 5% 0603 SMD", Storage Location="PCB Assembly WS", Supplier="ECE Dept"
S1 S2: library part WS_EVQPNF05M, "Panasonic 6 x 3.5mm SMD Light Touch Switch Type SMD", Manufacturer=Panasonic, Supplier Part Number 1=2079481, Manufacturer PN=EVQPNF05M, PackageDescription="6.0 x 3.5 mm", Storage Location="PCB Assembly WS", Supplier="ECE Dept", Supplier 1=Farnell, Supplier 2=Digi-Key, Supplier Part Number 2=P13598SCT-ND
S3: "DIP Switch, 4 Position, SPST SMD", Contact Current DC Max=25, Manufacturer="OMRON ELECTRONIC COMPONENTS", Manufacturer Part Number=A6SN-4101, Supplier Part Number 1=2029425, Contact Configuration=SPST, External Length / Height=12.1, No. of Switch Positions=4, Pitch Spacing=2.54, Storage Location="PCB Assembly WS", Supplier="ECE Dept", Supplier 1=Farnell
TP1 TP3 TP4 TP5 TP6 TP7 TP8 TP9 TP10 TP11 TP12 TP13 TP14 TP15 TP16 TP17 TP18 TP19 TP20 TP21 TP22 TP23 TP24 TP25 TP26 TP27 TP28 TP29 TP30 TP31 TP32 TP33 TP34 TP35: library part TP_0603, "Test Point 1.65X0.9X1.2mm SMD", Manufacturer="TE Connectivity AMP Connectors", Manufacturer Part Number=1625854-3, Supplier Part Number 1=A106145CT-ND, Mounting Type="Surface Mount", Supplier 1=Digi-Key, Terminal="0.063\" x 0.031\" x 0.045\" (1.60mm x 0.80mm x 1.15mm)", Type="PC Test Point"
U1: library part SE_ATSAM4S16BA-MU, "IC MCU 32BIT 512KB FLASH 64LQFP", Manufacturer=Atmel, Package / Case=64-LQFP, Supplier Part Number 1=ATSAM4S8BA-ANRCT-ND, Voltage - Supply (Vcc/Vdd)="1.62 V ~ 3.6 V", Code_JEDEC=MO-220VMMD-3, ComponentLink1Description="Manufacturer URL", ComponentLink1URL=http://www.atmel.com/, ComponentLink2Description="SAM4S Series Datasheet", ComponentLink2URL=http://www.atmel.com/dyn/resources/prod_documents/11100.pdf, ComponentLink3Description="SAM4S Series Summary", ComponentLink3URL=http://www.atmel.com/dyn/resources/prod_documents/11100S.pdf, Connectivity="I²C, IrDA, Memory Card, SPI, SSC, UART/USART, USB", Core Processor="ARM® Cortex®-M4", Core Size=32-Bit, Data Converters="A/D 11x12b, D/A 2x12b", Manufacturer Part Number=ATSAM4S8BA-ANR, Number of I/O=47, PackageDescription="64-Pin Quad Flat No-Lead (QFN) Sawn, 9 x 9 x 1.0 mm Body, 0.5 mm Pitch, Exposed Pad", PackageReference=64PS, PackageVersion="revJ, Jul-2007", Packaging="Cut Tape (CT)", Peripherals="Brown-out Detect/Reset, DMA, POR, PWM, WDT", Program Memory Size="512KB (512K x 8)", Program Memory Type=FLASH, RAM Size="128K x 8", Speed=120MHz, Supplier 1=Digi-Key
U2 U3: library part SV_CAT6219-330TDGT3, "IC REG LIN 3.3V 500MA TSOT23-5", Base Part Number=CAT6219, Current - Output=500mA, Package / Case="SOT-23-5 Thin, TSOT-23-5", Supplier Device Package=TSOT-23-5, Supplier Part Number=CAT6219-330TDGT3CT-ND, Voltage - Input (Max)=5.5V, Voltage - Output (Min/Fixed)=3.3V, Voltage Dropout (Max)="0.5V @ 500mA", ComponentLink1Description=http://www.onsemi.com/pub/Collateral/CAT6219-D.PDF, ComponentLink1URL=http://www.onsemi.com/pub/Collateral/CAT6219-D.PDF, ComponentLink2Description="CAT6219 Datasheet", ComponentLink2URL=\\maxwell\elecapp\AltiumDesigner\Libraries\DatasheetsNew\ENCE461\CAT6219-D.PDF, Manufacturer Part Number=CAT6219-330TDGT3, Supplier=Digi-Key, Supplier 1=Digi-Key
U4: library part ADP2302ARDZ-5.0-R7, "IC REG BUCK 5V 2A 8SOIC", Current - Output=2A, Frequency - Switching=700kHz, Supplier Part Number 1=ADP2302ARDZ-5.0-R7CT-ND, Voltage - Input (Max)=20V, Voltage - Output (Min/Fixed)=5V, ComponentLink1Description="ADP2302ARDZ-5.0 Datasheet", ComponentLink1URL=\\maxwell\elecapp\AltiumDesigner\Libraries\DatasheetsNew\ENCE461\ADP2302_2303.pdf, Manufacturer_Part_Number=ADP2302ARDZ-5.0-R7, Output Type=Fixed, Supplier 1=Digi-Key, Type=DEV, Vendor="Analog Devices Inc"
U5: "Accelerometer 3-Axis, +/-2 g / +/-4 g / +/-8 g / +/-16 g with Digital Output, 1.6 KHz BW, Industrial, 14-pin LGA, Tray", Manufacturer="Analog Devices", Supply Current="140 uA", Voltage Supply (V)="2.0 to 3.6", # of Axes=3, -3dB Bandwidth="1.6 KHz", ComponentLink1Description="Manufacturer URL", ComponentLink1URL=http://www.analog.com/en/index.html, ComponentLink2Description=Datasheet, ComponentLink2URL=http://www.analog.com/static/imported-files/data_sheets/ADXL345.pdf, ComponentLink3Description="Package Specification", ComponentLink3URL=http://www.analog.com/static/imported-files/data_sheets/ADXL343.pdf, ComponentLink4Description="Product URL", ComponentLink4URL=http://www.analog.com/en/mems-sensors/mems-inertial-sensors/adxl345/products/product.html, DatasheetVersion="Rev. D", Manufacturer 1="Analog Devices", Manufacturer Part Number 1=ADXL345BCCZ, Mounting Technology="Surface Mount", Output Type=Digital, PackageDescription="14-Pin Land Grid Array, 3 x 5 mm Body, 0.8 mm Pitch", PackageReference=CC-14-1, PackageVersion="03-16-2010-A, 03/2010", Packing=Tray, PartNumber=ADXL345BCCZ, Sensitivity="256/128/64/32 LSB/g"
U6: library part NRF24, "nRF24 SMD Module", Warning="No power planes near or under device"
U7: "1.8V - 5V level converter"
Y1: library part XT_CRYSTAL_12MHz_18pF, "CRYSTAL 12MHZ 18PF 6X3.5mm SMD", ESR (Equivalent Series Resistance)="60 Ohm", Frequency Stability=±50ppm, Frequency Tolerance=±30ppm, Load Capacitance=18pF, Manufacturer="CTS-Frequency Controls", Manufacturer Part Number=406C35D12M00000, Operating Mode=Fundamental, Operating Temperature="-20°C ~ 70°C", Package / Case="4-SMD, No Lead (DFN, LCC)", Supplier Part Number 1=CTX855CT-ND, Frequency=12MHz, Height="0.047\" (1.20mm)", Mounting Type="Surface Mount", Size / Dimension="0.236\" L x 0.138\" W (6.00mm x 3.50mm)", Supplier 1=Digi-Key

## Via types
v1: diameter 1, hole 0.5, Top Layer to Bottom Layer, 59 vias
v2: diameter 0.8, hole 0.3, Top Layer to Bottom Layer, 29 vias
v3: diameter 2, hole 1.5, Top Layer to Bottom Layer, 1 vias

## Nets (pads, with @x,y where several pads share a name; then routed paths per layer and width w, separated by ;. In a path a pad name is that pad's centre, name@x,y a point inside that pad or via, vN(x,y) a via of type N, cw(c..) or ccw(c..) an arc to the next point about the centre after c; other vN are vias at no path point)
3V3: C1.2 C3.2 C5.2 C8.1 C9.2 C11.2 C23.2 C24.2 C25.1 C27.2 DL1.2 DL2.2 DL3.2 H3.7 H3.8 P1.1 R9.2 R10.2 R11.1 TP1.1 TP3.1 TP7.1 TP23.1 TP32.1 U1.1 U1.7 U1.18 U1.45 U1.58 U2.5 U5.1 U5.6 U5.7 U7.6 | length 82.1
  Top Layer w0.3: v2(15.9,45.2) 15.9,47.4 TP32.1 ; C3.2@24.95,63.5 25.2,63.25 U1.18 28.35,63.25 v1(28.4,63.3) ; v1(32.8,63.5) 32.75,63.55 32.75,66.55 33.3,67.1 33.3,67.85 33.55,68.1 C1.2@33.6,68.1 ; v1(34.3,56.3) 34.25,56.25 34.25,52.35 34.5,52.1 34.5,51.85 34.541,51.809 C5.2@34.791,51.809 ; C11.2 35.65,69.6 35.9,69.35 35.9,69.3 36.3,68.9 36.3,66.651 35.824,66.175 35.8,66.175 35.75,66.125 U1.1 35.75,63.55 v1(35.7,63.5) ; v1(35.7,61.2) 35.861,61.2 36.311,60.75 U1.58 40.551,60.75 40.701,60.9 40.75,60.9 41,61.15 C9.2 ; v1(35.95,35.7) R10.2
  Top Layer w0.5: v2(15.9,45.2) 16.5,44.6 C27.2 16.5,43.45 16.25,43.2 U7.6 ; TP3.1 DL1.2 v1(22.8,77.8) 22.8,79.7 DL2.2 ; TP1.1 31.4,75.2 31.9,75.7 DL3.2 v1(33.65,73.9) ; U2.5 38.75,10.45 C8.1 v1(38.8,12.2) TP7.1 ; TP23.1 C24.2 ; v1(41.8,28.3) C24.2 ; U5.1 42,32.4 41.8,32.2 C23.2 C24.2 ; R9.2 v1(42,44.2) ; U5.6 C25.1@48,32.025 ; U5.7 47.5,36.525 v1(47.5,38.3) ; C25.1 v1(50.1,31.7) ; P1.1 57.4,10.7 R11.1@59.075,12.375
3V3RF: C15.1 L3.2 TP6.1 U3.5 | length 8.1
  Top Layer w0.5: v1(2.3,50.8) L3.2 TP6.1 ; C15.1 v2(11.6,46) ; U3.5 C15.1@11.65,43.85
5V: C21.2 C22.2 C28.2 H4.1 L2.2 R1.1 R3.1 TP33.1 U4.5 U7.1 | length 30.8
  Top Layer w0.3: L2.2@7.746,27.05 L2.2@7.796,27 ; R3.1 R3.1@13.6,33.5
  Top Layer w0.5: R3.1@13.6,33.5 14.5,32.6 v2(15.9,32.6) ; C28.2@16.25,34.75 U7.1 ; v2(25.6,10.4) R1.1
  Top Layer w1: L2.2 9.586,26.314 11.614,26.314 13.45,28.15 C22.2 15.6,31.6 16,31.2 ; C28.2 16.2,34.25 17.8,32.65 v2(17.8,32.2) ; U4.5 16,28.094 16,31.2 ; TP33.1 17.4,29.8 16,31.2
  other v2: 16,30.1
BATT_LOW: R16.2 U1.4 | length 10.4
  Top Layer w0.3: U1.4 34.25,69.65 34.75,70.15 R16.2@34.75,75.695
BATT_MEAS: R15.1 R17.1 U1.31 | length 37.6
  Top Layer w0.3: v1(24.6,56.2) 25.15,56.75 U1.31
  Top Layer w0.5: R15.1 28.5,27 ; v1(28.5,28.6) 28.5,27 ; R17.1 28.5,27
  Bottom Layer w0.3: v1(24.6,56.2) 24.6,51.6 21,48 21,36.1 v1(28.5,28.6)
Buzzer: R12.1 U1.44 | length 44.9
  Top Layer w0.3: v1(33.1,52) 33.75,52.65 U1.44 ; v1(49.35,25.6) R12.1
  Bottom Layer w0.3: v1(33.1,52) 30.2,49.1 30.2,36.1 40.7,25.6 v1@49.45,25.6
CE: U1.29 U6.3 | length 31
  Top Layer w0.3: U6.3 4.543,60.657 8.8,56.4 22.9,56.4 24.25,57.75 U1.29
CH_0: S3.1 U1.26 | length 16.4
  Top Layer w0.3: S3.1 27.725,48.805 27.725,58.975 27.45,59.25 U1.26
CH_1: S3.2 U1.37 | length 15.4
  Top Layer w0.3: S3.2 26.458,42.84 30.25,46.632 U1.37
CH_2: S3.3 U1.38 | length 18.1
  Top Layer w0.3: S3.3 26.458,40.3 30.75,44.592 U1.38
CH_3: S3.4 U1.41 | length 21.3
  Top Layer w0.3: S3.4 26.458,37.76 31.5,42.802 31.5,52.7 32.25,53.45 U1.41
CSN: TP25.1 U1.28 U6.4 | length 28.5
  Top Layer w0.3: U6.4 5.814,62.734 5.824,62.724 5.824,61.476 9.8,57.5 22.276,57.5 23.026,58.25 U1.28
D_N: H2.2 R5.1 TP10.1 | length 13.9
  Top Layer w0.381: R5.1 47.55,59.4 47.71,59.559 48.118,59.559 48.191,59.632 51.354,59.632 51.648,59.632 ; TP10.1 51.8,59.48 51.648,59.632 ; H2.2@59.283,59.64 59.265,59.657 55.876,59.657 55.851,59.632 51.8,59.632 51.648,59.632
D_P: H2.3 R4.1 TP9.1 | length 14.1
  Top Layer w0.381: R4.1 47.55,60.5 47.71,60.34 48.118,60.34 48.191,60.267 51.577,60.267 ; TP9.1 51.9,60.591 51.577,60.267 ; H2.3 59.293,60.292 55.613,60.292 55.588,60.267 51.577,60.267
GND: C1.1 C2.1 C3.1 C4.1 C5.1 C6.1 C7.2 C8.2 C9.1 C10.1 C11.1 C12.2 C14.2 C15.2 C16.2 C17.1 C18.1 C19.2 C21.1 C22.1 C23.1 C24.1 C25.2 C26.2 C27.1 C28.1 D1.1 H1.1 H1.3 H2.5 H2.6 H3.5 H3.6 H4.3 Q1.1 Q2.2 R2.2 R8.2 R17.2 S1.1 S2.1 S3.5 S3.6 S3.7 S3.8 TP30.1 TP31.1 U1.2 U1.17 U1.46 U1.60 U2.2 U3.2 U4.7 U4.EPAD U5.2 U5.4 U5.5 U5.12 U6.2 U7.2 U7.5 | length 163.1
  Top Layer w0.3: C22.1@10.35,31 10.75,31.4 C22.1 ; C22.1@10.8,31.6 C22.1@10.8,31.85 ; v3(19,25.5) U4.EPAD@19.672,24.828 ; v1(20.505,59.959) 20.695,59.959 20.954,59.7 C6.1 ; v1(24.4,66.6) 24.4,66.411 24.8,66.011 C3.1 ; U1.17 v1(26.475,67.775) ; C4.1@30.2,69.418 30.3,69.518 v1(30.3,71.2) ; C2.1 31.8,71.1 v1(31.9,71.2) ; S3.5 35.56,37.76 v2(35.6,37.8) ; S3.6 v2(35.7,40.3) ; S3.7 35.66,42.84 v2(35.7,42.8) ; S3.8 35.62,45.38 v2(35.7,45.3) ; v1(33.3,50.4) 33.489,50.4 33.739,50.151 34.773,50.151 C5.1@34.8,50.178 ; C1.1 33.6,69.7 v1(33.6,71.2) ; U1.46 34.75,52.995 36.6,51.145 v1(36.6,50.2) C5.1 ; v1(35.1,67.2) 35.234,67.066 35.234,66.576 35.25,66.56 U1.2 ; C11.1@35.8,71.2 C11.1 35.6,71.65 35.9,71.95 v1(35.9,72.7) ; U1.60 39.361,61.75 39.511,61.9 v1(39.7,61.9) ; v1(37.7,71) 39.2,72.5 R2.2 ; C12.2 42.311,67.2 42.711,67.6 v1(42.9,67.6) ; C17.1@41.15,64.85 41.3,64.7 v1(42.9,64.7) ; C10.1@41.6,58.6 41.7,58.5 43.8,58.5 v1(43.9,58.6) ; C9.1 43.911,61.2 44.211,61.5 v1(44.4,61.5) ; C18.1 42.55,62.45 46.061,62.45 46.311,62.2 47,62.2 v1(47.1,62.3) ; U5.4 U5.5 ; U5.5@45.296,32.921 46.216,32 46.35,32 46.6,31.75 C25.2 46.55,31.65 46.55,30.439 46.9,30.089 v1(46.9,29.9) ; U5.5@45.375,33 U5.5@45.375,33.05
  Top Layer w0.5: v2(3,7.8) 6.825,7.8 D1.1 7.3,7.325 v2(7.3,5) ; U6.2 3.271,65.029 v1(3.3,65) 3.3,63.5 C26.2 3.55,63.15 3.55,61.45 v1(3.5,61.4) ; v2(8,44.1) 9.8,44.1 C15.2 v2(10,42) ; v2(9.15,29.2) 10.55,29.2 C21.1 v2(12.1,29.4) ; v2(9.2,31) C22.1@10.35,31 ; v2(9.2,32.8) 9.85,32.8 C22.1@10.8,31.85 ; v2(12.3,35.2) 12.3,35.281 12.1,35.481 12.1,37.6 v2(12.6,38.1) U3.2 ; v2(14.9,25) 14.981,25 15.116,24.865 U4.7 18.365,24.865 v3(19,25.5) ; U7.2 17.2,36.581 17.6,36.181 v2(17.6,36.1) C28.1 17.7,34.6 v2(19.2,34.6) ; U7.5 17.2,41.2 v1(17.9,41.9) C27.1 17.9,43.7 17.9,44.757 18.4,45.257 v1(18.4,45.3) ; Q1.1@22.301,16.049 22.455,16.049 22.504,16 22.504,14.296 v1(22.6,14.2) ; v2(24.6,19.7) 24.6,23.119 24.7,23.219 v2(24.7,23.3) ; v2(29.799,9.087) 31.263,9.087 C7.2 32.55,9.05 v2(32.6,9) 33.1,9.5 U2.2 ; v1(30.9,25.2) 30.85,25.25 R17.2 30.9,27.05 v1(30.9,28.7) ; TP30.1 v2(38.8,7) C8.2 v2(40.6,8.9) ; U5.2 42.8,32.57 43.17,32.2 43.2,32.2 C23.1 ; U5.12 42.8,39.1 v1(43.6,39.9) ; v1(44.8,29.9) 44.05,29.9 43.85,30.1 C24.1 C23.1 ; v1(44.8,31.7) 44.05,31.7 43.85,31.5 C23.1 ; v1@49.212,23.012 49.312,22.912 Q2.2@51.05,22.912 ; v1(50.7,76.7) 50.75,76.65 R8.2@52.3,76.65 ; v1(51.1,52.2) 51.1,49.4 S2.1 ; S1.1 51.57,36.48 H3.5 H3.6 ; R8.2 R8.2@52.3,76.65 ; TP31.1 52.3,74.7 R8.2@52.3,76.65 ; v1(54.1,76.6) 54.05,76.65 R8.2@52.3,76.65 ; v1(56.8,55.1) C16.2 57.55,57 58.35,57.8 H2.6@59.3,57.8 ; H2.5 H2.6@59.3,62.8 ; H2.6@62,56.8 H2.6@62,59.3 ; H2.6@62,61.3 H2.6@62,63.8
  other v1: 49.2,23
INT1: TP20.1 U1.48 U5.8 | length 24
  Top Layer w0.3: U1.48 36.525,54.475 46,45 46,43.5 ; U5.8 46,43.5 ; TP20.1 46,43.5
INT2: TP22.1 U1.47 U5.9 | length 21.2
  Top Layer w0.3: U1.47 35.25,53.45 39.65,49.05 39.65,48.55 40,48.2 TP22.1 ; TP22.1@40.703,48.2 45.2,43.703 U5.9
IRQ: U1.23 U6.8 | length 18.9
  Top Layer w0.3: U6.8 11.2,67.1 11.2,66.2 16.3,61.1 24.181,61.1 24.531,60.75 U1.23
LED_IN: TP34.1 U1.32 U7.4 | length 19.9
  Top Layer w0.3: U7.4 18.15,40.425 18.325,40.6 18.476,40.6 19.526,41.65 19.55,41.65 19.876,41.976 TP34.1@19.876,42 ; TP34.1@19.95,42 21.684,43.734 21.684,45.884 26.475,50.675 U1.32 ; TP34.1@20.132,42.1 TP34.1
LED_OUT: H4.2 TP35.1 U7.3 | length 22.6
  Top Layer w0.3: H4.2@4.1,34.9 4.382,34.618 5.082,34.618 5.4,34.3 9.6,34.3 ; TP35.1 9.6,34.3 ; U7.3@18.325,37.4 18.15,37.575 18.15,38.6 17.75,39 16.08,39 14.938,37.857 14.938,34.893 14.345,34.3 9.6,34.3
MISO: TP29.1 U1.27 U6.7 | length 23.3
  Top Layer w0.3: U6.7 9.629,62.471 11.1,61 13.35,58.75 U1.27
MOSI: TP27.1 U1.22 U6.6 | length 23.1
  Top Layer w0.3: U6.6 8.357,69.024 8.533,69.2 12.5,69.2 16,65.7 19.8,61.9 24.4,61.9 25.05,61.25 U1.22
NetC2_2: C2.2 C4.2 C6.2 C10.2 L1.2 U1.8 U1.12 U1.24 U1.54 | length 36.6
  Top Layer w0.3: C6.2 24.7,59.7 25.25,60.25 27.297,60.25 30.25,63.203 ; C4.2@30.1,68.1 C4.2 30.25,68.1 U1.12 30.25,63.203 ; C2.2 31.8,67 32.25,66.55 U1.8 32.25,64.703 31.947,64.4 31.9,64.4 31.447,64.4 30.25,63.203 ; C10.2@40.325,58.625 40.2,58.75 U1.54 32.448,58.75 30.25,60.948 30.25,63.203 ; C10.2 40.4,58.058 42.158,56.3 L1.2
NetC7_1: C7.1 R1.2 U2.1 U2.3 | length 9
  Top Layer w0.5: R1.2@28.85,10.45 C7.1 U2.1 34.925,10.45 35.2,10.175 35.2,8.825 34.925,8.55 U2.3
NetC12_1: C12.1 C13.1 L1.1 TP5.1 U1.64 | length 38
  Top Layer w0.3: U1.64 37.525,65.7 ; 39.323,70.433 39.323,70.423 ; C12.1 39.025,67.2 37.525,65.7 ; C13.1 39.6,70.7 39.323,70.423 ; v1(40.3,69) 39.338,69 37.525,67.187 ; 37.525,65.7 37.525,67.187 ; 37.525,67.187 37.525,68.625 39.25,70.35 39.323,70.423
  Top Layer w0.5: L1.1 46.95,56.3 48.2,57.55 v1(48.2,57.6) ; TP5.1 L1.1@46.3,56.138
  Bottom Layer w0.3: v1(40.3,69) 46.249,69 48.6,66.649 48.6,58.126 48.175,57.701 v1@48.175,57.575
NetC13_2: C13.2 R2.1 | length 1.9
  Top Layer w0.3: C13.2 41.6,72.5 R2.1@41.7,72.6
NetC14_1: C14.1 R3.2 U3.1 U3.3 | length 8.6
  Top Layer w0.3: U3.1@11.65,39.25 U3.1
  Top Layer w0.5: U3.1 11.65,40.425 11.85,40.625 13.35,40.625 13.55,40.425 U3.3 ; R3.2 C14.1 U3.3@13.5,39.6
NetC17_2: C17.2 TP13.1 U1.62 Y1.1 | length 15
  Top Layer w0.3: U1.62 38.45,62.75 38.911,63.211 38.911,63.961 39.95,65 39.95,65.15 40.8,66 43.7,66 45.1,67.4 Y1.1@45.1,69 ; Y1.1 45.2,69.2 TP13.1
NetC18_2: C18.2 U1.61 Y1.3 | length 11.4
  Top Layer w0.3: U1.61 38.75,62.25 39.4,62.9 40.7,62.9 C18.2 41.8,63.4 46.55,63.4 46.95,63.8 46.95,63.9 47.4,64.35 47.5,64.35 Y1.3@47.5,64.6
NetC20_1: C20.1 D1.2 L2.1 U4.8 | length 15.2
  Top Layer w0.3: U4.8@16.354,23.595 U4.8
  Top Layer w0.5: D1.2 D1.2@8.1,15.275 ; L2.1@8.1,17 L2.1 12,17.8 C20.1 16.2,23.441 U4.8@16.354,23.595
  Top Layer w1: D1.2@8.1,15.275 L2.1@8.1,17
NetC20_2: C20.2 TP15.1 U4.1 | length 6.9
  Top Layer w0.5: TP15.1 19.2,20.4 C20.2 19.195,23.595 U4.1
NetC26_1: C26.1 L3.1 TP24.1 U6.1 | length 12
  Top Layer w0.3: L3.1@2.25,55.6 L3.1@2.3,55.6
  Top Layer w0.5: U6.1 C26.1 1.9,63.1 TP24.1 1.9,55.95 L3.1@2.25,55.6
NetDL1_1: DL1.1 R13.1 | length 1.5
  Top Layer w0.5: DL1.1 24.75,79.25 R13.1
NetDL2_1: DL2.1 R14.1 | length 1.6
  Top Layer w0.3: R14.1@26.15,83.1 R14.1
  Top Layer w0.5: DL2.1 R14.1@26.15,83.1
NetDL3_1: DL3.1 R16.1 | length 1.3
  Top Layer w0.5: DL3.1 R16.1
NetF1_2: F1.2 Q1.3 TP4.1 | length 9.1
  Top Layer w0.3: F1.2@18.6,17.05 F1.2 ; 19.525,17 19.525,15.702 20.674,14.553 20.674,12.826 TP4.1
  Top Layer w1: F1.2 19.525,17 Q1.3
NetP1_2: P1.2 Q2.3 R11.2 | length 13.1
  Top Layer w0.3: Q2.3@51.7,20.8 Q2.3@51.8,20.9
  Top Layer w0.5: Q2.3@51.7,20.8 P1.2 57.35,15.7 R11.2@58.9,14.15
NetQ2_1: Q2.1 R12.2 TP28.1 | length 5.7
  Top Layer w0.3: 52.45,24.5 54.9,24.5 TP28.1
  Top Layer w0.5: Q2.1 R12.2 52.398,25.4 R12.2@52.398,25.385 ; R12.2@52.398,25.371 R12.2@52.398,25.385
NetR4_2: R4.2 U1.57 | length 8.7
  Top Layer w0.3: U1.57 45.8,60.25 46.05,60.5 R4.2
NetR5_2: R5.2 U1.56 | length 8.8
  Top Layer w0.3: U1.56 45.649,59.75 45.799,59.6 45.85,59.6 46.05,59.4 R5.2
NetR7_2: R7.2 U4.4 | length 3.1
  Top Layer w0.5: U4.4 22.895,27.405 R7.2
NetTP8_1: TP8.1 U1.55 | length 18.3
  Top Layer w0.3: TP8.1 22.2,53 v1(25.5,53) ; v1(33.9,59.6) 35.989,59.6 36.339,59.25 U1.55
  Bottom Layer w0.3: v1(25.5,53) 32.1,59.6 v1(33.9,59.6)
nRST: H3.1 S1.2 TP16.1 U1.39 | length 36.8
  Top Layer w0.3: U1.39 31.25,56.45 32.15,57.35 35.103,57.35 47.753,44.7 50.426,42.028 51.172,42.028 51.5,41.7 51.5,42.35 52.29,41.56 H3.1 ; S1.2 51.3,41.4 51.3,41.7 S1.2
SCL: R10.1 TP19.1 U1.36 U5.14 | length 36.2
  Top Layer w0.3: v1(29.069,52.569) 29.203,52.703 29.47,52.703 29.75,52.983 U1.36 ; v1(32.5,32.2) 32.689,32.2 32.839,32.35 37.45,32.35 39.7,34.6 39.7,35.75 ; R10.1@38.6,35.75 39.7,35.75 ; U5.14 39.7,35.75
  Bottom Layer w0.3: v1(29.069,52.569) 29.069,35.631 v1(32.5,32.2)
SCLK: TP26.1 U1.21 U6.5 | length 24.8
  Top Layer w0.3: U6.5 7.086,68.9 8.286,70.1 16.098,70.1 18.274,67.924 19.798,66.4 23.448,62.75 24.45,62.75 25.45,61.75 U1.21
SDA: R9.1 TP21.1 U1.43 U5.13 | length 23.9
  Top Layer w0.3: U1.43 33.225,54.45 33.225,53.525 32.1,52.4 32.1,50.2 39.6,42.7 39.6,40.2 TP21.1 42,40 ; U5.13 42,39.65 42,40 ; R9.1 42,40
SLEEP: S2.2 U1.49 | length 18.6
  Top Layer w0.3: U1.49 38.65,56.25 50.1,44.8 S2.2 S2.2@51.3,44.7
STAT0: R13.2 U1.16 | length 13.2
  Top Layer w0.3: R13.2 28.25,75.5 U1.16
STAT1: R14.2 U1.15 | length 17.2
  Top Layer w0.3: R14.2 28.75,79.1 U1.15
SWCLK: H3.2 TP17.1 U1.53 | length 33
  Top Layer w0.3: U1.53 38.95,58.25 49.8,47.4 55.9,47.4 ; TP17.1 56.997,47.397 56.326,47.397 56.323,47.4 55.9,47.4 ; H3.2 59.9,43.4 55.9,47.4
SWDIO: H3.4 TP18.1 U1.51 | length 41.7
  Top Layer w0.3: U1.51 38.85,57.25 49.5,46.6 54.465,46.6 58.535,42.53 58.535,40.385 ; H3.4 58.535,40.385 ; TP18.1@61.6,48.4 61.6,41.3 60.685,40.385 58.535,40.385
USB_DETECT: R6.2 R8.1 TP11.1 U1.14 | length 37.5
  Top Layer w0.3: U1.14 29.25,76.85 31.745,79.345 52.3,79.345
  Top Layer w0.5: R8.1 52.3,79.345 R6.2
V_BATT: C19.1 Q1.2 R7.1 R15.2 TP14.1 U4.2 U4.3 | length 27
  Top Layer w0.3: TP14.1 26.15,28.35 R15.2
  Top Layer w0.5: U4.2 22.765,24.865 22.93,24.7 23.9,24.7 R7.1 ; U4.3 22.707,26.135 23,25.842 23,24.865 23,24.1 ; 23,23.5 23,24.2
  Top Layer w1: Q1.2 22.95,18.5 C19.1@22.95,21.35 ; Q1.2@22.6,17.95 24.704,17.95 24.727,17.927 26.15,19.35 R15.2 ; C19.1 23,23.5
V_BATT_RAW: F1.1 H1.2 | length 2.6
  Top Layer w0.5: F1.1@15.7,17 F1.1@15.725,16.975 ; F1.1 F1.1@15.76,16.99
  Top Layer w1: H1.2 F1.1@15.76,16.99
VBUS: C16.1 H2.1 R6.1 TP12.1 | length 16.1
  Top Layer w0.3: C16.1@56.7,58.5 C16.1 57,58.8 58.1,58.8 58.3,59 60.1,59 60.6,59.5 TP12.1
  Top Layer w0.5: R6.1 54.75,81.85 v1(54.8,81.8) ; v1(54.9,58.5) C16.1@56.7,58.5
pads on no net: H2.4 H3.3 H3.9 H3.10 MT1.1 MT2.1 MT3.1 MT4.1 U1.3 U1.5 U1.6 U1.9 U1.10 U1.11 U1.13 U1.19 U1.20 U1.25 U1.30 U1.33 U1.34 U1.35 U1.40 U1.42 U1.50 U1.52 U1.59 U1.63 U2.4 U3.4 U4.6 U5.3 U5.10 U5.11 Y1.2 Y1.4

## Polygon pours and split planes (outlines as drawn)
GND on Ground Plane (split plane): 63.49,0.51 0.51,0.51 0.51,69.5 21.3,69.5 21.3,84.49 63.49,84.49
5V on Power Plane (split plane): 27.848,23.696 27.848,0.51 0.51,0.51 0.51,33.448 18.096,33.448
3V3RF on Power Plane (split plane): 14.248,41.252 0.51,41.252 0.51,53.448 14.248,53.448
3V3 on Power Plane (split plane): 48.948,53.5 48.956,53.435 48.982,53.374 49.022,53.322 49.074,53.282 49.135,53.256 49.2,53.248 63.49,53.248 63.49,0.51 28.352,0.51 28.352,23.8 28.344,23.865 28.326,23.908 28.318,23.926 28.301,23.949 28.278,23.978 18.378,33.878 18.326,33.918 18.265,33.944 18.2,33.952 0.51,33.952 0.51,40.748 14.5,40.748 14.565,40.756 14.626,40.782 14.678,40.822 14.718,40.874 14.744,40.935 14.752,41 14.752,53.7 14.744,53.765 14.718,53.826 14.678,53.878 14.626,53.918 14.565,53.944 14.5,53.952 0.51,53.952 0.51,69.5 21.3,69.5 21.3,84.49 48.948,84.49
VBUS on Power Plane (split plane): 63.49,53.752 49.452,53.752 49.452,84.471 63.49,84.471

## Other copper
Top Layer:
  pour cut-out: -0.559,85.5 21.3,85.5 21.3,69.5 -0.454,69.5
  text "PCB footprint template_HAT V2023" at 21.8,0.9 h0.8
Bottom Layer:
  pour cut-out: -0.559,85.5 21.3,85.5 21.3,69.5 -0.454,69.5
Ground Plane (plane layer: these items are gaps in the copper):
  pour cut-out: -0.556,85 21.3,85 21.3,69.5 -0.454,69.5
Power Plane (plane layer: these items are gaps in the copper):
  pour cut-out: -0.559,85.5 21.3,85.5 21.3,69.5 -0.454,69.5
  lines w0.254: 0,41 0,45 ; 49.1,84.6 49.2,84.6 63.7,84.6 63.7,53.5
  lines w0.5: -0.1,33.7 18.2,33.7 28.1,23.8 28.1,-0.3 ; 0,41 14.5,41 14.5,53.7 0,53.7 ; 49.2,84.6 49.2,53.5 63.7,53.5